# Altium PCB debugger.PcbDoc (part 1 of 2)
Units mm, origin at the board's own origin, x right, y up, seen from the top; angles counter-clockwise.
Board outline 42.72 x 30.76 mm, 2 copper layers (Top Layer, Bottom Layer); 55 components, 51 nets, 242 pads, 80 vias.
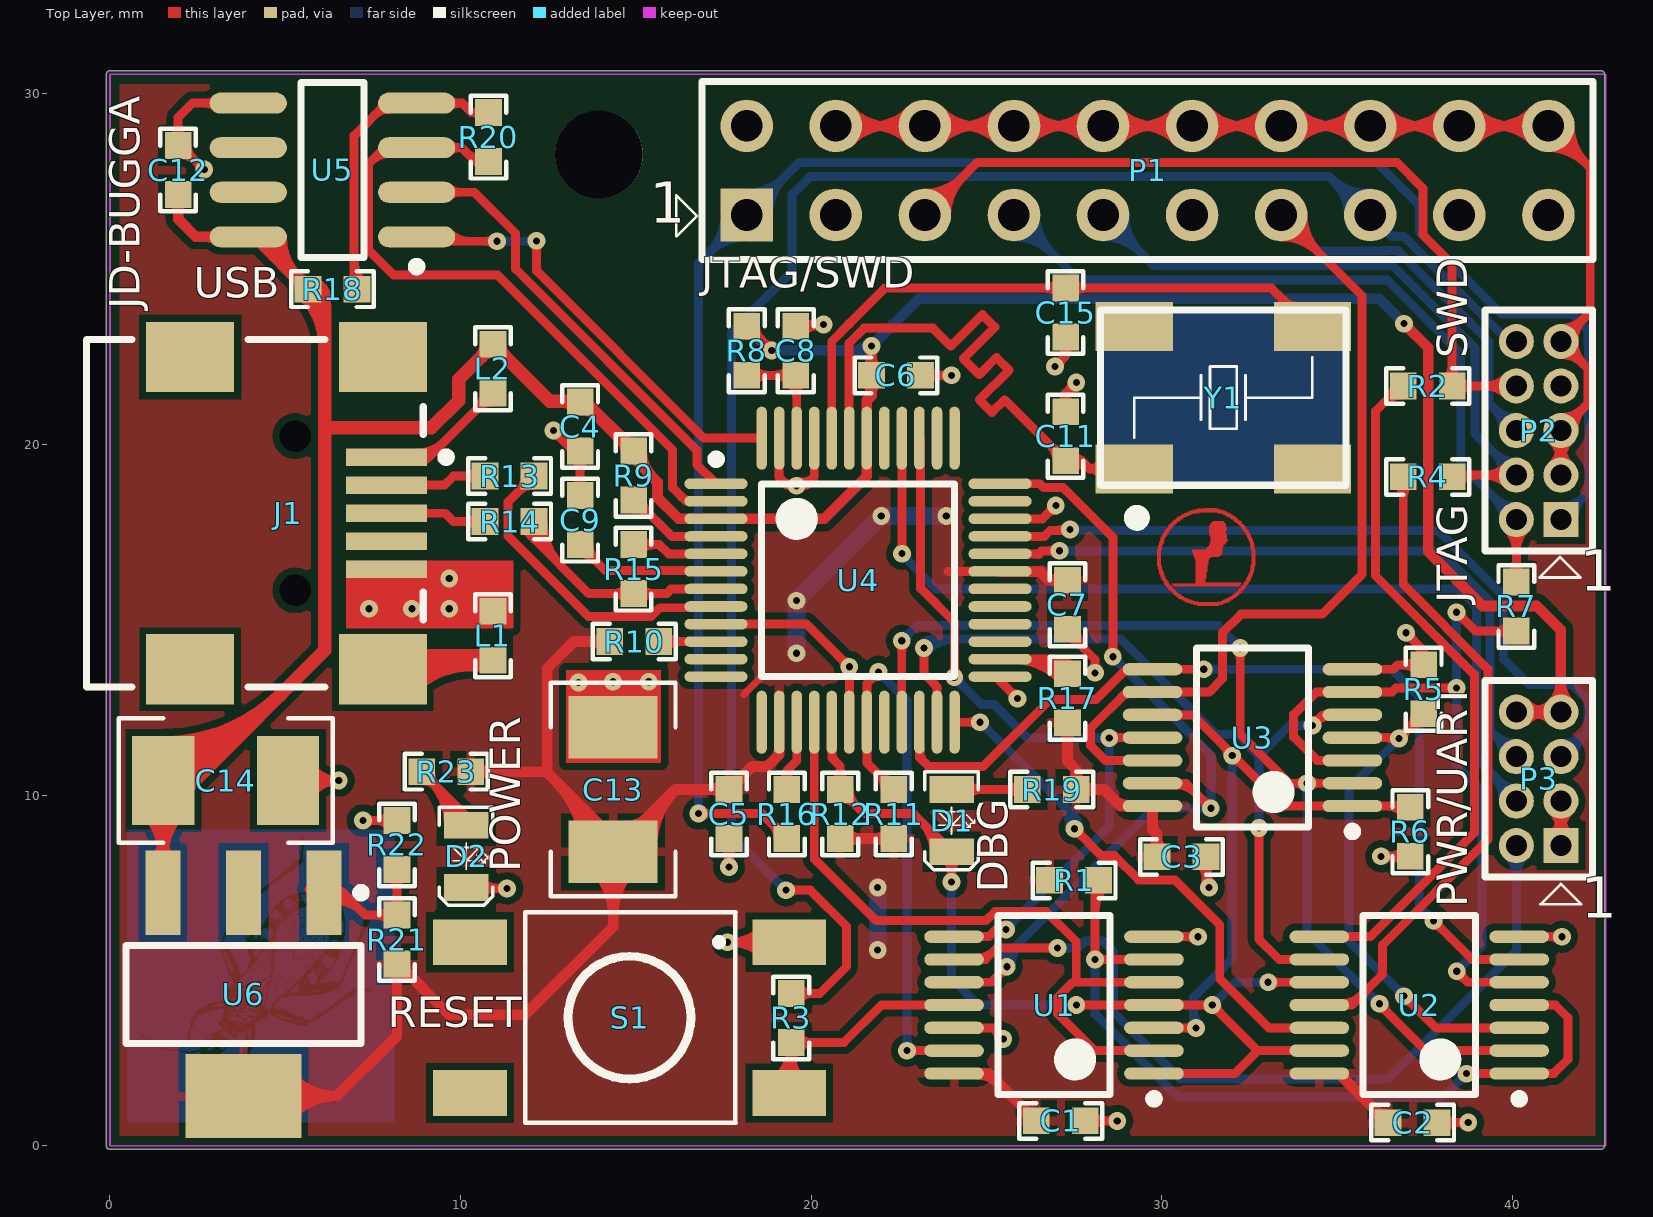
[diagram p0: Top Layer view]
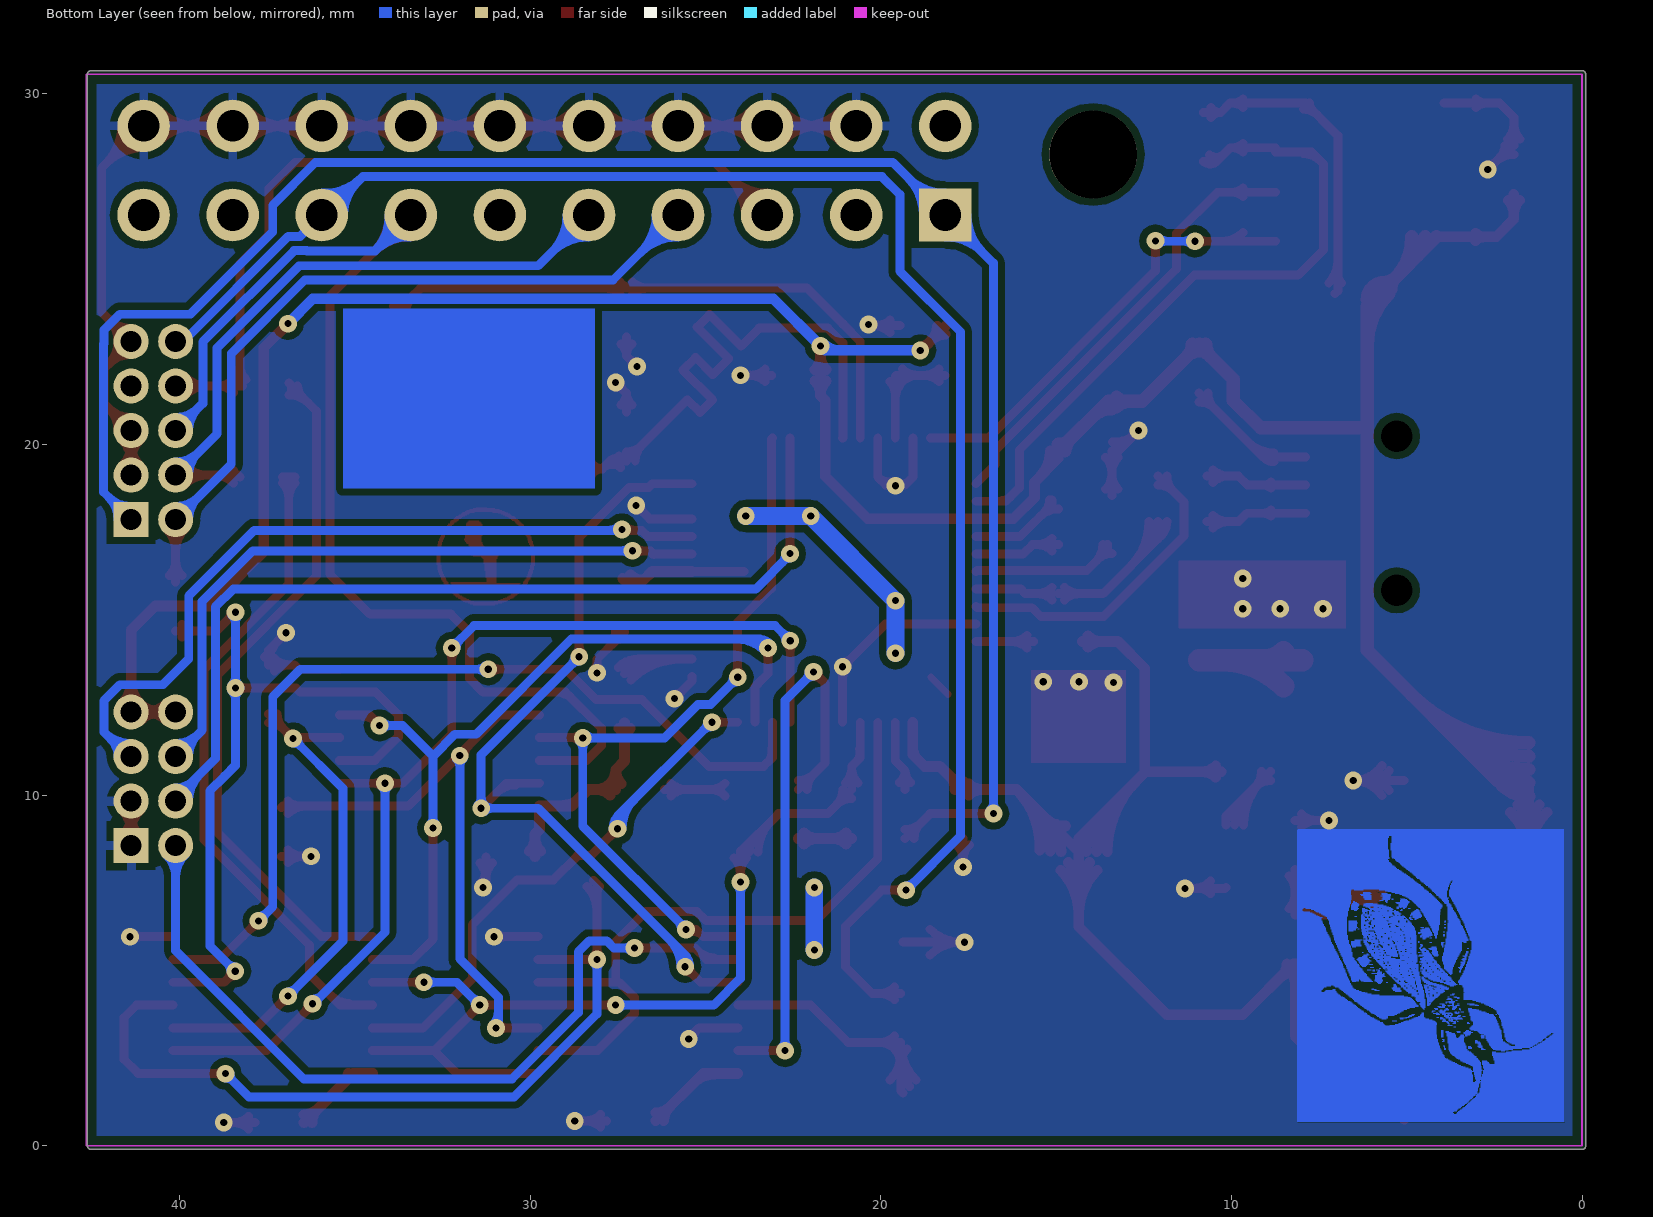
[diagram p1: Bottom Layer view, seen from below]

## Layer stack, top to bottom
Top Layer: signal copper 0.0356
Dielectric: dielectric 0.32, FR-4, Dk 4.8
Bottom Layer: signal copper 0.0356

## Board outline
0,-0.102 cw(c0,0) -0.102,0 -0.102,30.556 cw(c0,30.556) 0,30.658 42.52,30.658 cw(c42.52,30.556) 42.622,30.556 42.622,0 cw(c42.52,0) 42.52,-0.102

## Design rules (kind name [scope] priority, off if disabled: settings)
Clearance Clearance_GraphicalComponent [hasFootprint('BUG_INV')] p1: gap=0.001
Clearance Clearance_Keepout [Layer = ('KeepOutLayer') vs inPolygon] p2: gap=0.254
Clearance Clearance_Poly [inPoly] p3: gap=0.203
Clearance [All] p4: gap=0.127
ComponentClearance [All] p1: gap=0.152 collisioncheckmode=3 verticalgap=0.254 showdistances=FALSE
HoleSize [All] p1: absolutevalues=TRUE maxlimit=12.7 minlimit=0.203 maxpercent=80.000 minpercent=20.000
HoleToHoleClearance [All] p1: gap=0.3 allowstackedmicrovias=TRUE
MinimumSolderMaskSliver [All] p1: minsoldermaskwidth=0.05
PolygonConnect PolygonConnect_Via [IsVia] p1: connectstyle=Direct reliefconductorwidth=0.254 reliefentries=4 polygonreliefangle="90 Angle"
PolygonConnect [All] p2: connectstyle=Relief reliefconductorwidth=0.254 reliefentries=4 polygonreliefangle="90 Angle"
RoutingVias [All] p1: holewidth=0.203 width=0.508 viastyle="Through Hole" minholewidth=0.152 minwidth=0.457 maxholewidth=0.406 maxwidth=1.27
ShortCircuit ShortCircuit_GraphicalComponent [hasFootprint('BUG_INV')] p1: allowed=TRUE
ShortCircuit [All] p2: allowed=FALSE
SilkToSilkClearance [All] p1 off: silktosilkclearance=0.254
SilkscreenOverComponentPads [All] p1 off: minsilkscreentomaskgap=0.254
SolderMaskExpansion [All] p1: expansion=0.102
Width [All] p1: maxlimit=0.635 minlimit=0.025 preferedwidth=0.254
21 further rules are at their usual default settings.

## Components (designator, comment, footprint, x,y, rotation, side; value= is the part's Value field where it differs from the comment)
C1 "100nF" 0603 26.416,0.711 r0 top
C2 "100nF" 0603 36.449,0.66 r0 top
C3 "100nF" 0603 29.86,8.24 r0 top
C4 "100nF" 0603 13.411,21.209 r270 top
C5 "100nF" 0603 17.653,10.16 r270 top
C6 "100nF" 0603 23.114,21.971 r180 top
C7 "100nF" 0603 27.305,16.129 r270 top
C8 "100nF" 0603 19.558,23.368 r270 top
C9 "100nF" 0603 13.411,18.542 r270 top
C11 "20pF" 0603 27.254,19.533 r90 top
C12 "100nF" 0603 1.946,27.127 r90 top
C13 "22uF" 1210 14.351,11.938 r270 top
C14 "10uF" 1210 5.08,10.414 r180 top
C15 "20pF" 0603 27.254,24.46 r270 top
D1 "LED3" 0805_L 24.003,10.16 r270 top
D2 "LED3" 0805_L 10.16,9.144 r270 top
J1 "0481900001" 440247 0.036,18.039 r180 top
L1 "120ohm @ 100MHz" 0603 10.922,15.24 r270 top
L2 "120ohm @ 100MHz" 0603 10.922,21.463 r90 top
P1 "Header 10X2" HDR2X10 18.161,26.543 r0 top
P2 "MHDR2X5" MHDR2X5 41.377,17.856 r90 top
P3 "MHDR2X4" MHDR2X4 41.377,8.56 r90 top
R1 "10k" 0603 28.194,7.569 r180 top
R2 "27" 0603 36.881,21.666 r0 top
R3 "10" 0603 19.431,2.946 r90 top
R4 "27" 0603 36.881,19.075 r0 top
R5 "10k" 0603 37.465,13.716 r270 top
R6 "10k" 0603 37.084,8.255 r90 top
R7 "27" 0603 40.107,14.681 r90 top
R8 "475" 0603 18.161,23.368 r270 top
R9 "10k" 0603 14.935,18.415 r90 top
R10 "10k" 0603 15.649,14.379 r180 top
R11 "10k" 0603 22.352,10.16 r270 top
R12 "10k" 0603 20.828,10.16 r270 top
R13 "27E" 0603 10.7,19.1 r0 top
R14 "27E" 0603 10.7,17.8 r0 top
R15 "1k5" 0603 14.935,15.748 r90 top
R16 "10k" 0603 19.304,10.16 r270 top
R17 "10k" 0603 27.305,13.462 r270 top
R18 "10k" 0603 7.046,24.427 r180 top
R19 "330" 0603 27.559,10.16 r180 top
R20 "2k21" 0603 10.795,29.464 r270 top
R21 "2k7" 0603 8.185,6.581 r270 top
R22 "3k9" 0603 8.185,9.278 r270 top
R23 "330" 0603 10.287,10.668 r180 top
S1 "SW-PB" PUSHBTN 19.357,5.806 r270 top
U1 "SN74LVC125PWLE" PW014_N 26.924,4.013 r180 top
U2 "SN74LVC125PWLE" PW014_N 37.338,4.013 r180 top
U3 "SN74LS126AN" PW014_N 32.583,11.639 r180 top
U4 "FT2232D" LQFP-48_N 21.336,16.129 r0 top
U5 "93C46B-I/SN" SOIC-SN8_N 6.346,27.827 r180 top
U6 "LM1117IMP-ADJ" MP04A_N 3.81,4.318 r270 top
Y1 "XTAL" XTAL 31.75,21.336 r0 top
? "" GROUPTHERAPY 30.48,15.621 r0 top
? "" BUG_INV 0.508,9.017 r0 bottom

## Footprints (in the part's own frame and the unit in brackets; to place one, negate y for a bottom-side part, rotate by r counter-clockwise, add the part's x,y. Pads: shape width x height; smd on the part's side, far side on the other; paste and mask are expansions set on the pad)
0603 [mil]
  rect 30x30 smd: 1(0,0) 2(55,0)
  silkscreen extent -19,-20 74,20
0805_L [mil]
  rect 30x50 smd: 1(0,0) 2(70,0)
  silkscreen extent -20,-30 90,30
1210 [mil]
  rect 70x100 smd: 1(0,0) 2(140,0)
  silkscreen extent -50,-70 190,70
440247 [mm] "Connector; USB2.0, Type B, SM; 5 Position; Right Angle"
  rect 2.3x0.5 smd: 1(-7.85,-1.6) 2(-7.85,-0.8) 3(-7.85,0) 4(-7.85,0.8) 5(-7.85,1.6)
  rect 2.5x2 smd: 6(-7.75,4.45) 7(-2.25,4.45) 8(-7.75,-4.45) 9(-2.25,-4.45)
  round 0.6 hole 0.9 unplated: MH1(-5.25,2.2) MH2(-5.25,-2.2)
  silkscreen extent -9.68,-4.95 0.7,4.95
BUG_INV [mm]
  Top Layer drawing of 1912 lines, arcs and shapes, not listed
GROUPTHERAPY [mm]
  Top Layer lines w0.025: -0.61,0.914 -0.483,0.914 ; -0.61,0.94 -0.508,0.94 ; -0.61,0.965 -0.508,0.965 ; -0.61,0.991 -0.508,0.991 ; -0.61,1.016 -0.508,1.016 ; -0.61,1.041 -0.508,1.041 ; -0.61,1.067 -0.508,1.067 ; -0.61,1.092 -0.508,1.092 ; -0.61,1.118 -0.508,1.118 ; -0.61,1.143 -0.508,1.143 ; -0.61,1.168 -0.508,1.168 ; -0.61,1.194 -0.508,1.194 ; -0.61,1.219 -0.508,1.219 ; -0.61,1.245 -0.508,1.245 ; -0.61,1.27 -0.508,1.27 ; -0.61,1.295 -0.508,1.295 ; -0.61,1.321 -0.508,1.321 ; -0.61,1.346 -0.508,1.346 ; -0.61,1.372 -0.508,1.372 ; -0.61,1.397 -0.483,1.397 ; -0.584,0.813 -0.457,0.813 ; -0.584,0.838 -0.483,0.838 ; -0.584,0.864 -0.483,0.864 ; -0.584,0.889 -0.483,0.889 ; -0.584,1.422 -0.483,1.422 ; -0.584,1.448 -0.483,1.448 ; -0.584,1.473 -0.483,1.473 ; -0.584,1.499 -0.483,1.499 ; -0.559,0.711 -0.432,0.711 ; -0.559,0.737 -0.432,0.737 ; -0.559,0.762 -0.457,0.762 ; -0.559,0.787 -0.457,0.787 ; -0.559,1.524 -0.457,1.524 ; -0.559,1.549 -0.457,1.549 ; -0.559,1.575 -0.432,1.575 ; -0.559,1.6 -0.432,1.6 ; -0.533,0.66 -0.406,0.66 ; -0.533,0.686 -0.432,0.686 ; -0.533,1.626 -0.432,1.626 ; -0.533,1.651 -0.406,1.651 ; -0.508,0.61 -0.381,0.61 ; -0.508,0.635 -0.406,0.635 ; -0.508,1.676 -0.406,1.676 ; -0.508,1.702 -0.406,1.702 ; -0.508,1.727 -0.381,1.727 ; -0.483,0.533 -0.356,0.533 ; -0.483,0.559 -0.381,0.559 ; -0.483,0.584 -0.381,0.584 ; -0.483,1.753 -0.381,1.753 ; -0.483,1.778 -0.356,1.778 ; -0.457,0.508 -0.33,0.508 ; -0.457,1.803 -0.33,1.803 ; -0.457,1.829 -0.33,1.829 ; -0.432,0.457 -0.305,0.457 ; -0.432,0.483 -0.33,0.483 ; -0.432,1.854 -0.305,1.854 ; -0.406,0.406 -0.279,0.406 ; -0.406,0.432 -0.279,0.432 ; -0.406,1.88 -0.305,1.88 ; -0.406,1.905 -0.279,1.905 ; -0.381,0.381 -0.254,0.381 ; -0.381,1.93 -0.254,1.93 ; -0.381,1.956 -0.254,1.956 ; -0.356,0.356 -0.229,0.356 ; -0.356,1.981 -0.229,1.981 ; -0.33,0.305 -0.178,0.305 ; -0.33,0.33 -0.203,0.33 ; -0.33,2.007 -0.203,2.007 ; -0.305,0.279 -0.178,0.279 ; -0.305,2.032 -0.178,2.032 ; -0.305,2.057 -0.152,2.057 ; -0.279,0.254 -0.127,0.254 ; -0.279,2.083 -0.127,2.083 ; -0.254,0.229 -0.102,0.229 ; -0.254,2.108 -0.102,2.108 ; -0.229,0.203 -0.076,0.203 ; -0.229,2.134 -0.076,2.134 ; -0.203,0.178 -0.051,0.178 ; -0.203,0.406 1.778,0.406 ; -0.203,2.159 -0.051,2.159 ; -0.178,0.152 -0.025,0.152 ; -0.178,0.381 1.753,0.381 ; -0.178,2.184 -0.025,2.184 ; -0.152,0.127 0,0.127 ; -0.152,2.21 0.025,2.21 ; -0.127,0.102 0.051,0.102 ; -0.127,0.356 1.727,0.356 ; -0.127,2.235 0.051,2.235 ; -0.102,0.076 0.076,0.076 ; -0.076,2.261 0.102,2.261 ; -0.051,0.051 0.127,0.051 ; -0.051,2.286 0.127,2.286 ; -0.025,0.025 0.178,0.025 ; -0.025,2.311 0.178,2.311 ; 0,0 0.229,0 ; 0.025,2.337 0.229,2.337 ; 0.051,-0.025 0.279,-0.025 ; 0.051,2.362 0.305,2.362 ; 0.102,-0.051 0.356,-0.051 ; 0.102,2.388 0.356,2.388 ; 0.152,-0.076 0.432,-0.076 ; 0.152,2.413 0.432,2.413 ; 0.203,-0.102 0.559,-0.102 ; 0.203,2.438 0.584,2.438 ; 0.254,-0.127 1.372,-0.127 ; 0.254,2.464 1.372,2.464 ; 0.33,-0.152 1.295,-0.152 ; 0.33,2.489 1.321,2.489 ; 0.381,1.346 1.245,1.346 ; 0.381,1.372 1.245,1.372 ; 0.406,1.27 1.219,1.27 ; 0.406,1.295 1.245,1.295 ; 0.406,1.321 1.245,1.321 ; 0.406,2.515 1.245,2.515 ; 0.432,-0.178 1.245,-0.178 ; 0.432,1.194 1.143,1.194 ; 0.432,1.219 1.194,1.219 ; 0.432,1.245 1.219,1.245 ; 0.457,1.118 0.864,1.118 ; 0.457,1.143 0.889,1.143 ; 0.457,1.168 0.914,1.168 ; 0.483,0.432 1.778,0.432 ; 0.483,0.457 0.762,0.457 ; 0.483,0.483 0.762,0.483 ; 0.483,0.508 0.762,0.508 ; 0.483,0.533 0.762,0.533 ; 0.483,0.559 0.762,0.559 ; 0.483,0.584 0.787,0.584 ; 0.483,0.61 0.787,0.61 ; 0.483,0.635 0.787,0.635 ; 0.483,0.66 0.787,0.66 ; 0.483,0.686 0.787,0.686 ; 0.483,0.711 0.787,0.711 ; 0.483,0.737 0.787,0.737 ; 0.483,0.762 0.813,0.762 ; 0.483,0.787 0.813,0.787 ; 0.483,0.813 0.813,0.813 ; 0.483,0.838 0.813,0.838 ; 0.483,0.864 0.813,0.864 ; 0.483,0.889 0.813,0.889 ; 0.483,0.914 0.813,0.914 ; 0.483,0.94 0.813,0.94 ; 0.483,0.965 0.838,0.965 ; 0.483,0.991 0.838,0.991 ; 0.483,1.016 0.838,1.016 ; 0.483,1.041 0.838,1.041 ; 0.483,1.067 0.838,1.067 ; 0.483,1.092 0.838,1.092 ; 0.533,-0.203 1.143,-0.203 ; 0.533,2.54 1.143,2.54 ; 0.737,2.565 1.067,2.565 ; 0.787,1.397 1.245,1.397 ; 0.787,1.422 1.245,1.422 ; 0.813,1.448 1.245,1.448 ; 0.838,1.473 1.27,1.473 ; 0.864,1.499 1.27,1.499 ; 0.864,1.524 1.27,1.524 ; 0.864,1.854 1.346,1.854 ; 0.864,1.88 1.346,1.88 ; 0.864,1.905 1.346,1.905 ; 0.864,1.93 1.346,1.93 ; 0.864,1.956 1.372,1.956 ; 0.864,1.981 1.372,1.981 ; 0.864,2.007 1.372,2.007 ; 0.864,2.032 1.346,2.032 ; 0.889,1.549 1.321,1.549 ; 0.889,1.575 1.346,1.575 ; 0.889,1.778 1.372,1.778 ; 0.889,1.803 1.372,1.803 ; 0.889,1.829 1.346,1.829 ; 0.889,2.057 1.346,2.057 ; 0.889,2.083 1.346,2.083 ; 0.914,1.6 1.372,1.6 ; 0.914,1.626 1.372,1.626 ; 0.914,1.651 1.397,1.651 ; 0.914,1.676 1.397,1.676 ; 0.914,1.702 1.372,1.702 ; 0.914,1.727 1.372,1.727 ; 0.914,1.753 1.372,1.753 ; 0.914,2.108 1.346,2.108 ; 0.914,2.134 1.321,2.134 ; 0.94,2.159 1.295,2.159 ; 0.991,2.184 1.27,2.184 ; 1.118,-0.102 1.422,-0.102 ; 1.118,2.438 1.422,2.438 ; 1.219,-0.076 1.473,-0.076 ; 1.219,2.413 1.473,2.413 ; 1.27,-0.051 1.499,-0.051 ; 1.27,2.388 1.499,2.388 ; 1.321,2.362 1.549,2.362 ; 1.346,-0.025 1.549,-0.025 ; 1.372,0 1.575,0 ; 1.372,2.337 1.575,2.337 ; 1.422,0.025 1.626,0.025 ; 1.422,2.311 1.626,2.311 ; 1.473,0.051 1.651,0.051 ; 1.473,2.286 1.651,2.286 ; 1.499,2.261 1.676,2.261 ; 1.524,0.076 1.702,0.076 ; 1.549,0.102 1.702,0.102 ; 1.549,2.235 1.702,2.235 ; 1.575,0.127 1.727,0.127 ; 1.575,2.21 1.753,2.21 ; 1.6,2.184 1.778,2.184 ; 1.626,0.152 1.778,0.152 ; 1.626,0.178 1.778,0.178 ; 1.626,2.159 1.803,2.159 ; 1.676,0.203 1.803,0.203 ; 1.676,2.134 1.803,2.134 ; 1.702,0.229 1.854,0.229 ; 1.702,2.108 1.854,2.108 ; 1.727,0.254 1.854,0.254 ; 1.727,0.279 1.88,0.279 ; 1.727,2.083 1.854,2.083 ; 1.753,2.057 1.88,2.057 ; 1.778,0.305 1.905,0.305 ; 1.778,0.33 1.905,0.33 ; 1.778,2.007 1.905,2.007 ; 1.778,2.032 1.905,2.032 ; 1.803,0.356 1.93,0.356 ; 1.803,1.981 1.93,1.981 ; 1.829,0.381 1.956,0.381 ; 1.829,1.956 1.956,1.956 ; 1.854,0.406 1.981,0.406 ; 1.854,0.432 1.981,0.432 ; 1.854,1.905 1.981,1.905 ; 1.854,1.93 1.981,1.93 ; 1.88,0.457 2.007,0.457 ; 1.88,1.88 2.007,1.88 ; 1.905,0.483 2.007,0.483 ; 1.905,0.508 2.032,0.508 ; 1.905,1.829 2.032,1.829 ; 1.905,1.854 2.007,1.854 ; 1.93,0.533 2.057,0.533 ; 1.93,0.559 2.057,0.559 ; 1.93,1.803 2.057,1.803 ; 1.956,0.584 2.057,0.584 ; 1.956,0.61 2.083,0.61 ; 1.956,1.727 2.083,1.727 ; 1.956,1.753 2.057,1.753 ; 1.956,1.778 2.057,1.778 ; 1.981,0.635 2.083,0.635 ; 1.981,0.66 2.108,0.66 ; 1.981,1.676 2.108,1.676 ; 1.981,1.702 2.083,1.702 ; 2.007,0.686 2.108,0.686 ; 2.007,0.711 2.108,0.711 ; 2.007,0.737 2.134,0.737 ; 2.007,1.6 2.134,1.6 ; 2.007,1.626 2.108,1.626 ; 2.007,1.651 2.108,1.651 ; 2.032,0.762 2.134,0.762 ; 2.032,0.787 2.134,0.787 ; 2.032,0.813 2.159,0.813 ; 2.032,1.524 2.159,1.524 ; 2.032,1.549 2.134,1.549 ; 2.032,1.575 2.134,1.575 ; 2.057,0.838 2.159,0.838 ; 2.057,0.864 2.159,0.864 ; 2.057,0.889 2.159,0.889 ; 2.057,0.914 2.159,0.914 ; 2.057,0.94 2.184,0.94 ; 2.057,1.397 2.184,1.397 ; 2.057,1.422 2.159,1.422 ; 2.057,1.448 2.159,1.448 ; 2.057,1.473 2.159,1.473 ; 2.057,1.499 2.159,1.499 ; 2.083,0.965 2.184,0.965 ; 2.083,0.991 2.184,0.991 ; 2.083,1.016 2.184,1.016 ; 2.083,1.041 2.184,1.041 ; 2.083,1.067 2.184,1.067 ; 2.083,1.092 2.184,1.092 ; 2.083,1.118 2.184,1.118 ; 2.083,1.143 2.184,1.143 ; 2.083,1.168 2.184,1.168 ; 2.083,1.194 2.184,1.194 ; 2.083,1.219 2.184,1.219 ; 2.083,1.245 2.184,1.245 ; 2.083,1.27 2.184,1.27 ; 2.083,1.295 2.184,1.295 ; 2.083,1.321 2.184,1.321 ; 2.083,1.346 2.184,1.346 ; 2.083,1.372 2.184,1.372
HDR2X10 [mm] "Connector; Header; 10x2 Position"
  rect 1.5x1.5 hole 0.9: 1(0,0)
  round 1.5 hole 0.9: 2(0,2.54) 3(2.54,0) 4(2.54,2.54) 5(5.08,0) 6(5.08,2.54) 7(7.62,0) 8(7.62,2.54) 9(10.16,0) 10(10.16,2.54) 11(12.7,0) 12(12.7,2.54) 13(15.24,0) 14(15.24,2.54) 15(17.78,0) 16(17.78,2.54) 17(20.32,0) 18(20.32,2.54) 19(22.86,0) 20(22.86,2.54)
  silkscreen extent -1.27,-1.27 24.13,3.81
LQFP-48_N [mm] "Thin QFP, 48-Leads, Body 7x7mm, Pitch 0.5mm, IPC Medium Density"
  oval 1.8x0.3 smd: 1(-4.05,2.75) 2(-4.05,2.25) 3(-4.05,1.75) 4(-4.05,1.25) 5(-4.05,0.75) 6(-4.05,0.25) 7(-4.05,-0.25) 8(-4.05,-0.75) 9(-4.05,-1.25) 10(-4.05,-1.75) 11(-4.05,-2.25) 12(-4.05,-2.75) 25(4.05,-2.75) 26(4.05,-2.25) 27(4.05,-1.75) 28(4.05,-1.25) 29(4.05,-0.75) 30(4.05,-0.25) 31(4.05,0.25) 32(4.05,0.75) 33(4.05,1.25) 34(4.05,1.75) 35(4.05,2.25) 36(4.05,2.75)
  oval 0.3x1.8 smd: 13(-2.75,-4.05) 14(-2.25,-4.05) 15(-1.75,-4.05) 16(-1.25,-4.05) 17(-0.75,-4.05) 18(-0.25,-4.05) 19(0.25,-4.05) 20(0.75,-4.05) 21(1.25,-4.05) 22(1.75,-4.05) 23(2.25,-4.05) 24(2.75,-4.05) 37(2.75,4.05) 38(2.25,4.05) 39(1.75,4.05) 40(1.25,4.05) 41(0.75,4.05) 42(0.25,4.05) 43(-0.25,4.05) 44(-0.75,4.05) 45(-1.25,4.05) 46(-1.75,4.05) 47(-2.25,4.05) 48(-2.75,4.05)
  silkscreen extent -4.17,-2.75 2.75,3.57, body extent -3.5,-3.5 3.5,3.5, height 1.6
MHDR2X4 [mm] "Connector; Header; 4x2 Position"
  rect 1x1 hole 0.6: 1(0,0)
  round 1 hole 0.6: 2(0,1.27) 3(1.27,0) 4(1.27,1.27) 5(2.54,0) 6(2.54,1.27) 7(3.81,0) 8(3.81,1.27)
  silkscreen extent -0.9,-0.9 4.71,2.17, body extent -1,-1 4.81,2.27, height 3.4
MHDR2X5 [mm] "Connector; Header; 5x2 Position"
  rect 1x1 hole 0.6: 1(0,0)
  round 1 hole 0.6: 2(0,1.27) 3(1.27,0) 4(1.27,1.27) 5(2.54,0) 6(2.54,1.27) 7(3.81,0) 8(3.81,1.27) 9(5.08,0) 10(5.08,1.27)
  silkscreen extent -0.9,-0.9 5.98,2.17, body extent -1,-1 6.08,2.27, height 3.4
MP04A_N [mm] "SOT223, 4-Leads, Body 6.5x3.5mm, Pitch 2.3mm, Lead Span 7mm, IPC Medium Density"
  rect 2.4x1 smd: 1(-2.9,2.3) 2(-2.9,0) 3(-2.9,-2.3)
  rect 2.4x3.3 smd: 4(2.9,0)
  silkscreen extent -3.02,-3.35 1.4,3.48, body extent -1.85,-3.35 1.85,3.35, height 1.8
PUSHBTN [mm]
  rect 1.3x2.1 smd: 1(-0.001,0.011) 2(4.299,0.011) 3(-0.001,-9.089) 4(4.299,-9.089)
  silkscreen extent -0.85,-7.51 5.15,-1.51, body extent -0.85,-7.51 5.15,-1.52, height 4.3
PW014_N [mm] "TSOP, 14-Leads, Body 5x4.4mm, Pitch 0.65mm, IPC Medium Density"
  oval 1.7x0.35 smd: 1(-2.85,1.95) 2(-2.85,1.3) 3(-2.85,0.65) 4(-2.85,0) 5(-2.85,-0.65) 6(-2.85,-1.3) 7(-2.85,-1.95) 8(2.85,-1.95) 9(2.85,-1.3) 10(2.85,-0.65) 11(2.85,0) 12(2.85,0.65) 13(2.85,1.3) 14(2.85,1.95)
  silkscreen extent -2.98,-2.55 1.6,2.8, body extent -2.25,-2.55 2.25,2.55, height 1.2
SOIC-SN8_N [mm] "SOIC, 8-Leads, Body 4.9x3.8mm, Pitch 1.27mm, IPC Medium Density"
  oval 2.2x0.6 smd: 1(-2.4,1.905) 2(-2.4,0.635) 3(-2.4,-0.635) 4(-2.4,-1.905) 5(2.4,-1.905) 6(2.4,-0.635) 7(2.4,0.635) 8(2.4,1.905)
  silkscreen extent -2.53,-2.5 0.9,2.88, body extent -2,-2.5 2,2.5, height 1.75
XTAL [mm]
  rect 2.2x1.4 smd: 1(-2.54,-2.032) 2(2.54,-2.032) 3(2.54,2.032) 4(-2.54,2.032)
  silkscreen extent -3.5,-3.61 3.5,2.5, body extent -3.5,-2.5 3.5,2.5, height 1.5

## Part data
C1 C2 C3 C4 C5 C6 C7 C8 C9 C11 C12 C13 C14 C15: library part Cap, "Capacitor"
D1 D2: "Typical BLUE SiC LED"
J1: "USB On-The-Go (OTG) Mini-B Receptacle, Right Angle, SMT, 0.80mm (.031\") Pitch, Solder Tabs with Back Cover, Recessed Type"
L1 L2: library part Inductor, "Inductor"
P1: "Header, 10-Pin, Dual row"
P2: "Header, 5-Pin, Dual row"
P3: "Header, 4-Pin, Dual row"
R1 R2 R3 R4 R5 R6 R7 R8 R9 R10 R11 R12 R13 R14 R15 R16 R17 R18 R19 R20 R21 R22 R23: library part Res2, "Resistor"
S1: "Switch"
U1 U2: "Quadruple Bus Buffer Gate with 3-State Outputs"
U3: "Quadruple Bus Buffer with 3-State Outputs"
U4: library part FT2232C, "Dual USB UART/FIFO Chip, LQFP-48"
U5: "1K, 64x16-bit, 5.0V Microwire Serial EEPROM, 8-Pin SOIC 150mil, Industrial Temperature"
U6: "800mA Low-Dropout Linear Regulator"
Y1: "Crystal Oscillator"

## Free pads (board coordinates)
  round 2.5 hole 2.5 unplated: ""(13.945,28.27)

## Via types
v1: diameter 0.508, hole 0.203, Top Layer to Bottom Layer, tented both sides, 80 vias

## Nets (pads, with @x,y where several pads share a name; then routed paths per layer and width w, separated by ;. In a path a pad name is that pad's centre, name@x,y a point inside that pad or via, vN(x,y) a via of type N, cw(c..) or ccw(c..) an arc to the next point about the centre after c; other vN are vias at no path point)
0V: C1.2 C2.2 C3.2 C4.2 C5.2 C6.1 C7.2 C8.1 C9.1 C11.2 C12.2 C13.1 C14.1 C15.2 D2.2 J1.5 L1.1 P1.4 P1.6 P1.8 P1.10 P1.12 P1.14 P1.16 P1.18 P1.20 P2.3 P2.5 P2.9 P3.1 P3.3 R5.1 R6.1 R22.1 S1.1 U1.7 U1.12 U2.7 U3.7 U4.9 U4.18 U4.25 U4.34 U4.45 U4.47 U5.5 | length 191.5
  Top Layer w0.254: C12.2@1.767,28.704 ccw(c1.333,29.137) 1.946,29.137 ccw(c2.559,29.137) C12.2@2.126,28.704 ; C12.2@1.946,28.27 cw(c1.946,27.51) 2.483,28.048 ; C12.2@2.2,28.524 ccw(c2.667,28.524) 2.337,28.194 ; v1@2.565,27.838 ccw(c2.259,27.838) 2.476,28.055 ccw(c2.692,28.272) v1@2.692,27.965 ; v1(2.692,27.838) 2.007,28.524 C12.2@1.946,28.524 1.946,29.327 2.351,29.732 U5.5@3.946,29.732 ; U5.5@3.024,29.61 ccw(c2.729,29.314) 2.729,29.732 ccw(c2.729,30.15) U5.5@3.024,29.854 ; C14.1@5.08,10.414 v1(6.528,10.414) ; C14.1@5.499,10.126 cw(c6.045,9.751) 6.045,10.414 cw(c6.045,11.077) C14.1@5.499,10.702 ; C14.1@5.708,9.983 cw(c6.528,9.42) v1(6.528,10.414) ; C14.1@5.708,10.845 ccw(c6.528,11.408) v1(6.528,10.414) ; v1@6.438,10.324 ccw(c6.221,10.107) 6.221,10.414 ccw(c6.221,10.721) v1@6.438,10.504 ; v1@6.579,10.414 v1(6.528,10.414) ; v1(7.22,9.278) R22.1@8.185,9.278 ; v1@7.31,9.188 cw(c7.527,8.971) 7.527,9.278 cw(c7.527,9.584) v1@7.31,9.367 ; J1.5@8,16.4 9.677,16.4 10.143,16.4 ; R22.1@8.005,9.098 ccw(c7.572,8.664) 7.572,9.278 ccw(c7.572,9.891) R22.1@8.005,9.457 ; J1.5@8.839,16.4 cw(c8.839,15.342) v1@9.588,16.09 ; J1.5@8.873,16.526 ccw(c9.177,16.83) 9.177,16.4 ; 9.453,16.4 cw(c9.453,15.955) v1@9.767,16.27 ; v1@9.799,16.144 cw(c10.143,16.041) 10.143,16.4 ; D2.2@10.16,7.366 10.185,7.341 v1(11.328,7.341) ; 10.219,16.324 cw(c9.135,15.24) L1.1@10.668,15.24 ; D2.2@10.594,7.186 cw(c10.966,6.814) 10.966,7.341 ; D2.2@10.594,7.546 ccw(c11.089,8.041) v1@11.089,7.341 ; 10.653,15.89 cw(c10.002,15.24) L1.1@10.922,15.24 ; L1.1@11.176,15.367 11.112,15.43 10.143,16.4 ; v1@11.239,7.251 ccw(c11.022,7.034) 11.022,7.341 ccw(c11.022,7.647) v1@11.239,7.43 ; v1@12.649,20.269 cw(c12.649,19.963) 12.866,20.179 cw(c13.083,20.396) v1@12.776,20.396 ; v1(12.649,20.396) 13.233,19.812 C4.2@13.411,19.812 C9.1@13.411,18.542 ; v1@12.738,20.307 ccw(c13.328,20.897) C4.2@13.392,20.065 ; C9.1@13.232,18.722 ccw(c12.798,19.155) 13.411,19.155 ccw(c14.024,19.155) C9.1@13.591,18.722 ; C4.2@13.232,19.632 cw(c12.798,19.199) 13.411,19.199 cw(c14.024,19.199) C4.2@13.591,19.632 ; U4.9@17.286,14.879 19.868,14.879 v1(21.086,13.661) U4.18@21.086,12.079 ; C5.2@17.473,8.583 cw(c17.04,8.15) 17.653,8.15 cw(c18.266,8.15) C5.2@17.833,8.583 ; v1@17.563,8.04 ccw(c17.346,8.257) 17.653,8.257 ccw(c17.96,8.257) v1@17.743,8.04 ; v1(17.612,5.806) S1.1@19.368,5.806 ; v1(17.653,7.95) C5.2@17.653,8.763 ; v1@17.702,5.717 cw(c17.919,5.5) 17.919,5.806 cw(c17.919,6.113) v1@17.702,5.896 ; S1.1@18.598,5.437 ccw(c17.705,4.544) 17.705,5.806 ccw(c17.705,7.069) S1.1@18.598,6.176 ; U4.47@19.086,20.179 19.086,19.065 19.304,18.847 ; 19.213,18.938 ccw(c19.368,19.093) v1@19.505,18.921 ; C8.1@19.456,23.393 19.558,23.393 20.345,23.393 20.371,23.393 v1(20.345,23.419) ; v1@19.477,18.753 ccw(c19.304,18.642) 19.304,18.847 ; v1@19.616,18.944 ccw(c19.742,19.414) 20.086,19.07 ; v1@19.69,18.753 cw(c19.863,18.642) 19.863,18.847 ; C8.1@19.738,23.188 cw(c20.233,22.693) v1@20.233,23.393 ; C8.1@19.738,23.548 ccw(c20.11,23.92) v1@20.11,23.393 ; 19.977,23.393 ccw(c19.977,23.787) v1@20.256,23.509 ; U4.45@20.086,20.179 20.086,19.07 ; P1.4@20.701,29.083 P1.6@23.241,29.083 P1.8@25.781,29.083 P1.10@28.321,29.083 P1.12@30.861,29.083 P1.14@33.401,29.083 P1.16@35.941,29.083 P1.18@38.481,29.083 P1.20@41.021,29.083 42.215,27.889 42.215,24.333 ; v1@20.959,13.661 ccw(c20.652,13.661) 20.869,13.878 ccw(c21.086,14.095) v1@21.086,13.788 ; P1.4@20.962,28.822 cw(c21.592,28.192) 21.592,29.083 cw(c21.592,29.974) P1.4@20.962,29.344 ; v1@20.996,13.571 cw(c20.779,13.355) 21.086,13.355 cw(c21.393,13.355) v1@21.176,13.571 ; P1.4@21.142,28.642 cw(c22.205,27.579) 22.205,29.083 cw(c22.205,30.587) P1.4@21.142,29.524 ; P1.6@22.8,28.642 ccw(c21.737,27.579) 21.737,29.083 ccw(c21.737,30.587) P1.6@22.8,29.524 ; P1.6@22.98,28.822 ccw(c22.35,28.192) 22.35,29.083 ccw(c22.35,29.974) P1.6@22.98,29.344 ; C6.1@23.114,21.971 v1(24.003,21.971) ; C6.1@23.294,21.791 cw(c23.727,21.358) 23.727,21.971 cw(c23.727,22.584) C6.1@23.294,22.151 ; P1.6@23.502,28.822 cw(c24.132,28.192) 24.132,29.083 cw(c24.132,29.974) P1.6@23.502,29.344 ; P1.6@23.682,28.642 cw(c24.745,27.579) 24.745,29.083 cw(c24.745,30.587) P1.6@23.682,29.524 ; v1@23.913,21.881 ccw(c23.696,21.664) 23.696,21.971 ccw(c23.696,22.278) v1@23.913,22.061 ; U1.12@24.074,3.363 25.186,3.363 v1@25.476,3.073 ; 25.241,3.308 cw(c24.981,3.048) v1@25.349,3.048 ; 25.303,3.247 ccw(c25.476,3.42) v1@25.476,3.175 ; P1.8@25.34,28.642 ccw(c24.277,27.579) 24.277,29.083 ccw(c24.277,30.587) P1.8@25.34,29.524 ; U4.25@25.386,13.379 25.386,13.247 v1(25.883,12.751) ; U4.34@25.386,17.879 26.591,17.879 v1(26.975,18.263) ; P1.8@25.52,28.822 ccw(c24.89,28.192) 24.89,29.083 ccw(c24.89,29.974) P1.8@25.52,29.344 ; v1@25.756,12.751 ccw(c25.449,12.751) 25.666,12.968 ccw(c25.883,13.184) v1@25.883,12.878 ; P1.8@26.042,28.822 cw(c26.672,28.192) 26.672,29.083 cw(c26.672,29.974) P1.8@26.042,29.344 ; P1.8@26.222,28.642 cw(c27.285,27.579) 27.285,29.083 cw(c27.285,30.587) P1.8@26.222,29.524 ; v1@26.848,18.263 cw(c26.541,18.263) 26.758,18.046 cw(c26.975,17.829) v1@26.975,18.136 ; v1(26.949,22.225) 27.254,22.53 ; v1@26.949,22.352 ccw(c26.949,22.659) 27.166,22.442 ccw(c27.383,22.225) v1@27.076,22.225 ; C11.2@27.094,21.127 ccw(c26.821,21.463) 27.254,21.463 ; C15.2@27.094,22.866 cw(c26.821,22.53) 27.254,22.53 ; C11.2@27.254,20.93 27.254,21.463 ; C15.2@27.254,23.063 27.254,22.53 ; C7.2@27.305,14.478 cw(c27.305,14.049) C7.2@27.609,14.352 ; C7.2@27.305,14.656 28.092,13.868 v1(28.092,13.487) ; C11.2@27.414,21.127 cw(c27.687,21.463) 27.254,21.463 ; C15.2@27.414,22.866 ccw(c27.687,22.53) 27.254,22.53 ; v1@27.432,21.768 cw(c27.125,21.768) 27.342,21.551 cw(c27.559,21.334) v1@27.559,21.641 ; C7.2@27.559,14.732 ccw(c28.356,14.732) 27.792,14.168 ; v1(27.559,21.768) 27.254,21.463 ; C1.2@27.813,0.711 v1(28.727,0.711) v1@28.753,0.711 ; P1.10@27.88,28.642 ccw(c26.817,27.579) 26.817,29.083 ccw(c26.817,30.587) P1.10@27.88,29.524 ; C1.2@27.993,0.532 cw(c28.426,0.098) 28.426,0.711 cw(c28.426,1.324) C1.2@27.993,0.891 ; v1@28.003,13.577 ccw(c27.786,13.794) 28.092,13.794 ccw(c28.399,13.794) v1@28.182,13.577 ; P1.10@28.06,28.822 ccw(c27.43,28.192) 27.43,29.083 ccw(c27.43,29.974) P1.10@28.06,29.344 ; P1.10@28.582,28.822 cw(c29.212,28.192) 29.212,29.083 cw(c29.212,29.974) P1.10@28.582,29.344 ; v1@28.638,0.621 ccw(c28.421,0.405) 28.421,0.711 ccw(c28.421,1.018) v1@28.638,0.801 ; P1.10@28.762,28.642 cw(c29.825,27.579) 29.825,29.083 cw(c29.825,30.587) P1.10@28.762,29.524 ; U1.7@29.774,5.963 v1(31.033,5.963) ; P1.12@30.42,28.642 ccw(c29.357,27.579) 29.357,29.083 ccw(c29.357,30.587) P1.12@30.42,29.524 ; P1.12@30.6,28.822 ccw(c29.97,28.192) 29.97,29.083 ccw(c29.97,29.974) P1.12@30.6,29.344 ; v1@30.943,5.873 ccw(c30.726,5.657) 30.726,5.963 ccw(c30.726,6.27) v1@30.943,6.053 ; C3.2@31.077,8.06 cw(c30.644,7.627) 31.257,7.627 cw(c31.87,7.627) C3.2@31.437,8.06 ; P1.12@31.122,28.822 cw(c31.752,28.192) 31.752,29.083 cw(c31.752,29.974) P1.12@31.122,29.344 ; C3.2@31.257,7.882 ccw(c31.859,7.882) v1@31.433,7.456 ; C3.2@31.257,8.24 31.257,7.453 v1(31.344,7.366) v1@31.445,7.366 ; P1.12@31.302,28.642 cw(c32.365,27.579) 32.365,29.083 cw(c32.365,30.587) P1.12@31.302,29.524 ; P1.14@32.96,28.642 ccw(c31.897,27.579) 31.897,29.083 ccw(c31.897,30.587) P1.14@32.96,29.524 ; P1.14@33.14,28.822 ccw(c32.51,28.192) 32.51,29.083 ccw(c32.51,29.974) P1.14@33.14,29.344 ; P1.14@33.662,28.822 cw(c34.292,28.192) 34.292,29.083 cw(c34.292,29.974) P1.14@33.662,29.344 ; P1.14@33.842,28.642 cw(c34.905,27.579) 34.905,29.083 cw(c34.905,30.587) P1.14@33.842,29.524 ; U3.7@35.433,13.589 36.601,13.589 36.728,13.716 R5.1@37.465,13.716 ; P1.16@35.5,28.642 ccw(c34.437,27.579) 34.437,29.083 ccw(c34.437,30.587) P1.16@35.5,29.524 ; P1.16@35.68,28.822 ccw(c35.05,28.192) 35.05,29.083 ccw(c35.05,29.974) P1.16@35.68,29.344 ; P1.16@36.202,28.822 cw(c36.832,28.192) 36.832,29.083 cw(c36.832,29.974) P1.16@36.202,29.344 ; v1(36.246,8.255) R6.1@37.084,8.255 ; v1@36.336,8.165 cw(c36.552,7.948) 36.552,8.255 cw(c36.552,8.562) v1@36.336,8.345 ; P1.16@36.382,28.642 cw(c37.445,27.579) 37.445,29.083 cw(c37.445,30.587) P1.16@36.382,29.524 ; R6.1@36.904,8.075 ccw(c36.471,7.642) 36.471,8.255 ccw(c36.471,8.868) R6.1@36.904,8.435 ; v1@36.957,14.503 cw(c36.957,14.197) 37.174,14.414 cw(c37.391,14.63) v1@37.084,14.63 ; v1(36.957,14.63) 37.465,14.122 ; 37.183,14.405 cw(c36.502,13.723) R5.1@37.465,13.716 ; R5.1@37.285,13.536 ccw(c36.852,13.103) 36.852,13.716 ccw(c36.852,14.329) R5.1@37.285,13.896 ; R5.1@37.354,13.944 ccw(c37.267,14.122) 37.465,14.122 ; R5.1@37.576,13.944 cw(c37.663,14.122) 37.465,14.122 ; C2.2@37.846,0.66 v1(38.735,0.66) v1@38.76,0.66 ; C2.2@38.026,0.481 cw(c38.459,0.047) 38.459,0.66 cw(c38.459,1.274) C2.2@38.026,0.84 ; P1.18@38.04,28.642 ccw(c36.977,27.579) 36.977,29.083 ccw(c36.977,30.587) P1.18@38.04,29.524 ; P1.18@38.22,28.822 ccw(c37.59,28.192) 37.59,29.083 ccw(c37.59,29.974) P1.18@38.22,29.344 ; v1@38.645,0.571 ccw(c38.428,0.354) 38.428,0.66 ccw(c38.428,0.967) v1@38.645,0.75 ; P1.18@38.742,28.822 cw(c39.372,28.192) 39.372,29.083 cw(c39.372,29.974) P1.18@38.742,29.344 ; P1.18@38.922,28.642 cw(c39.985,27.579) 39.985,29.083 cw(c39.985,30.587) P1.18@38.922,29.524 ; U2.7@40.188,5.963 v1(41.408,5.963) ; P1.20@40.58,28.642 ccw(c39.517,27.579) 39.517,29.083 ccw(c39.517,30.587) P1.20@40.58,29.524 ; P1.20@40.76,28.822 ccw(c40.13,28.192) 40.13,29.083 ccw(c40.13,29.974) P1.20@40.76,29.344 ; P1.20@41.021,28.46 cw(c41.021,26.956) 42.085,28.019 cw(c43.148,29.083) P1.20@41.644,29.083 ; P1.20@41.021,28.714 cw(c41.021,27.823) 41.651,28.453 cw(c42.281,29.083) P1.20@41.39,29.083 ; P3.1@41.113,8.824 ccw(c40.476,9.46) 41.377,9.46 ccw(c42.277,9.46) P3.1@41.64,8.824 ; P3.3@41.113,9.566 cw(c40.476,8.929) 41.377,8.929 cw(c42.277,8.929) P3.3@41.64,9.566 ; P2.3@41.113,19.39 ccw(c40.476,20.027) 41.377,20.027 ccw(c42.277,20.027) P2.3@41.64,19.39 ; P2.5@41.113,20.132 cw(c40.476,19.496) 41.377,19.496 cw(c42.277,19.496) P2.5@41.64,20.132 ; v1@41.318,5.873 ccw(c41.101,5.657) 41.101,5.963 ccw(c41.101,6.27) v1@41.318,6.053 ; P3.1@41.377,8.56 P3.3@41.377,9.83 ; P2.3@41.377,19.126 P2.5@41.377,20.396 42.154,21.173 42.154,22.159 P2.9@41.377,22.936 42.215,23.774 42.215,24.333 ; P2.5@41.377,20.769 ccw(c41.377,21.67) 42.013,21.033 ccw(c42.65,20.396) P2.5@41.75,20.396 ; P2.9@41.377,22.563 cw(c41.377,21.663) 42.013,22.299 cw(c42.65,22.936) 41.75,22.936 cw(c42.65,22.936) 42.013,23.573 cw(c41.377,24.21) P2.9@41.377,23.309 ; P3.3@41.529,9.83 P3.3@41.529,9.906 ; 42.215,24.181 42.215,24.333 ; 19.304,18.847 19.583,18.847 19.863,18.847 ; 19.863,18.847 20.086,19.07 ; R5.1@37.465,13.716 37.465,14.122
  other v1: 25.476,3.048 13.36,13.208 14.351,13.233 15.367,13.233 7.391,15.316 8.611,15.316 9.677,15.316 9.677,16.18 19.583,18.821
+3V3: C1.1 C2.1 C3.1 C5.1 C7.1 C13.2 R1.2 R10.2 R11.2 R12.2 R17.2 R19.1 R21.2 R23.1 U1.14 U2.14 U3.14 U4.14 U4.31 U6.4 | length 94.9
  Top Layer w0.203: 18.085,12.878 18.567,13.36
  Top Layer w0.254: 23.905,16.379 U4.31@25.386,16.379
  Top Layer w0.305: U6.4@3.81,1.418 6.473,1.418 ; U6.4@4.835,0.947 cw(c5.829,0.133) 5.829,1.418 cw(c5.829,2.703) U6.4@4.835,1.889 ; U6.4@5.07,0.754 cw(c6.473,-0.395) 6.473,1.418 ; U6.4@5.07,2.082 ccw(c6.473,3.231) 6.473,1.418 ; R21.2@8.023,5.022 cw(c7.633,4.632) 8.185,4.632 cw(c8.737,4.632) R21.2@8.346,5.022 ; R21.2@8.185,4.955 cw(c8.185,4.293) 8.653,4.761 ; R21.2@8.413,5.184 ccw(c8.855,5.184) R21.2@8.543,4.871 ; R23.1@10.287,10.668 12.446,10.668 12.471,10.643 ; R23.1@10.449,10.506 cw(c10.839,10.116) 10.839,10.668 cw(c10.839,11.22) R23.1@10.449,10.83 ; 12.694,10.42 cw(c10.656,8.382) C13.2@13.538,8.382 ; 13.214,9.9 cw(c11.697,8.382) C13.2@13.843,8.382 ; 13.735,9.379 cw(c12.737,8.382) C13.2@14.148,8.382 ; C13.2@13.83,7.861 cw(c12.573,6.604) 14.351,6.604 cw(c16.129,6.604) C13.2@14.872,7.861 ; C13.2@14.046,8.077 cw(c13.309,7.34) 14.351,7.34 cw(c15.393,7.34) C13.2@14.656,8.077 ; R10.2@14.09,14.217 ccw(c13.7,13.827) 13.7,14.379 ccw(c13.7,14.931) R10.2@14.09,14.541 ; R10.2@14.252,14.379 13.236,14.379 12.471,13.614 12.471,10.643 ; C13.2@14.732,9.119 ccw(c14.732,9.977) 15.339,9.37 ; C13.2@14.859,8.389 cw(c15.915,8.45) C13.2@15.167,9.198 ; C13.2@15.163,8.407 cw(c16.825,8.502) 15.648,9.679 ; C13.2@15.467,8.424 cw(c17.735,8.554) 16.129,10.16 ; C5.1@17.491,9.998 ccw(c17.101,9.608) 17.101,10.16 ccw(c17.101,10.712) C5.1@17.491,10.322 ; C5.1@17.653,10.389 ccw(c17.653,10.94) 18.043,10.55 ccw(c18.433,10.16) C5.1@17.882,10.16 ; 18.971,11.047 ccw(c18.689,11.329) U4.14@19.088,11.329 ; U4.14@19.086,12.079 19.086,11.161 18.743,10.818 18.311,10.818 C5.1@17.653,10.16 16.129,10.16 ; R12.2@20.828,8.763 R11.2@22.352,8.763 ; R12.2@20.99,8.601 cw(c21.38,8.211) 21.38,8.763 cw(c21.38,9.315) R12.2@20.99,8.925 ; R11.2@22.19,8.601 ccw(c21.8,8.211) 21.8,8.763 ccw(c21.8,9.315) R11.2@22.19,8.925 ; U1.14@24.074,2.063 25.064,2.063 C1.1@26.416,0.711 ; U1.14@24.749,2.041 cw(c24.749,1.226) 25.325,1.802 ; U1.14@24.754,2.041 cw(c24.865,1.549) 25.221,1.906 ; U4.31@25.386,16.379 26.522,16.379 26.772,16.129 ; C1.1@26.187,0.711 ccw(c25.636,0.711) 26.026,1.101 ccw(c26.416,1.492) C1.1@26.416,0.94 ; C7.1@27.139,15.971 ccw(c26.772,15.621) 26.772,16.129 ; C7.1@27.139,16.287 cw(c26.772,16.637) 26.772,16.129 ; R17.2@27.143,11.903 cw(c26.753,11.513) 27.305,11.513 cw(c27.857,11.513) R17.2@27.467,11.903 ; R17.2@27.305,12.065 27.305,10.973 27.559,10.719 R19.1@27.559,10.16 28.346,10.16 28.817,9.689 U3.14@29.733,9.689 29.733,9.017 29.86,8.89 C3.1@29.86,8.24 ; C7.1@27.356,16.18 C7.1@27.305,16.129 26.772,16.129 ; R19.1@27.397,10.322 ccw(c27.007,10.712) 27.559,10.712 ccw(c28.111,10.712) 27.721,10.322 ccw(c28.111,10.712) 28.111,10.16 ccw(c28.111,9.608) R19.1@27.721,9.998 ; 28.609,9.898 ccw(c29.058,10.347) U3.14@29.058,9.712 ; C3.1@29.698,8.402 ccw(c29.308,8.792) 29.86,8.792 ccw(c30.412,8.792) C3.1@30.022,8.402 ; U2.14@34.488,2.063 35.046,2.063 C2.1@36.449,0.66 ; U2.14@35.186,2.063 ccw(c35.522,2.063) 35.284,1.825 ; C2.1@36.22,0.66 ccw(c35.669,0.66) 36.059,1.051 ccw(c36.449,1.441) C2.1@36.449,0.889 ; 6.473,1.418 8.185,3.13 R21.2@8.185,5.184 8.23,5.184 9.68,3.734 11.836,3.734 14.351,6.248 C13.2@14.351,8.382 ; 12.471,10.643 14.351,8.763 C13.2@14.351,8.382 ; C13.2@14.351,8.382 16.129,10.16
  Bottom Layer w0.508: v1(19.583,14.046) v1(19.583,15.545) v1(21.996,17.958) v1(23.851,17.958) ; v1(21.895,5.588) v1(21.895,7.366)
+5V: C4.1 C6.2 C12.1 C14.2 L2.2 P3.7 P3.8 R8.1 R9.2 R18.2 U4.3 U4.42 U5.8 U6.3 | length 121.2
  Top Layer w0.305: C14.2@1.003,9.512 cw(c-0.254,8.255) 1.524,8.255 cw(c3.302,8.255) C14.2@2.045,9.512 ; C14.2@1.219,9.728 cw(c0.482,8.991) 1.524,8.991 cw(c2.566,8.991) C14.2@1.829,9.728 ; U6.3@1.264,8.164 ccw(c0.637,8.791) 1.524,8.791 ; U6.3@1.51,7.218 1.524,7.232 C14.2@1.524,10.414 2.413,10.414 ; 1.524,8.723 ccw(c2.315,8.723) U6.3@1.756,8.164 ; C12.1@1.785,26.965 cw(c1.394,26.575) 1.946,26.575 cw(c2.498,26.575) C12.1@2.108,26.965 ; C12.1@1.946,27.127 1.946,26.427 2.451,25.922 U5.8@4.154,25.922 ; U5.8@3.042,25.818 ccw(c2.79,25.566) 2.79,25.922 ccw(c2.79,26.278) U5.8@3.042,26.026 ; L2.2@10.922,22.83 L2.2@10.922,22.86 ; R9.2@14.935,19.812 14.935,19.605 15.619,18.921 15.619,18.481 16.22,17.879 20.368,17.879 21.586,19.097 U4.42@21.586,20.179 21.586,21.256 21.717,21.387 C6.2@21.717,21.971 v1(21.717,22.809) ; R9.2@15.164,19.812 ccw(c16.216,19.812) 15.472,19.068 ; R8.1@18.161,23.139 cw(c18.161,22.588) 18.551,22.978 cw(c18.941,23.368) R8.1@18.39,23.368 ; R8.1@18.161,23.368 18.847,22.682 v1(18.872,22.682) ; 18.655,22.874 ccw(c18.872,23.09) v1@18.872,22.784 ; C6.2@21.555,21.809 cw(c21.165,21.419) 21.717,21.419 cw(c22.269,21.419) C6.2@21.879,21.809 ; C6.2@21.555,22.133 ccw(c21.165,22.523) 21.717,22.523 ccw(c22.269,22.523) C6.2@21.879,22.133 ; v1(36.906,23.444) 37.592,22.758 37.592,16.942 39.139,15.395 40.688,15.395 41.377,14.707 P3.7@41.377,12.37 P3.8@40.183,12.37 ; P3.8@40.352,12.124 cw(c40.946,11.531) 40.946,12.37 cw(c40.946,13.209) P3.8@40.352,12.616 ; P3.7@41.131,12.124 ccw(c40.537,11.531) 40.537,12.37 ccw(c40.537,13.209) 41.131,12.616 ccw(c40.537,13.209) 41.377,13.209 ccw(c42.216,13.209) P3.7@41.622,12.616
  Top Layer w0.381: C14.2@1.524,9.97 ccw(c1.524,11.043) C14.2@2.283,10.284 ; C14.2@1.524,10.351 ccw(c1.524,12.343) 2.933,10.934 ; C14.2@1.524,10.731 ccw(c1.524,13.644) 3.584,11.585 ; C14.2@1.524,11.112 ccw(c1.524,14.945) 4.234,12.235 ; C14.2@1.524,11.493 ccw(c1.524,16.246) 4.884,12.885 ; 2.413,10.414 6.127,14.128 6.127,23.949 R18.2@5.649,24.427 U5.8@4.154,25.922 ; U5.8@4.475,25.922 ccw(c5.248,25.922) 4.701,25.375 ; U5.8@4.856,25.922 ccw(c6.549,25.922) R18.2@5.352,24.724 ; R18.2@5.459,24.427 ccw(c4.999,24.427) 5.324,24.752 ccw(c5.649,25.077) R18.2@5.649,24.618 ; R18.2@5.514,24.292 cw(c4.036,22.814) 6.127,22.814 ; R18.2@5.647,24.237 cw(c5.642,23.751) 6.127,23.751 ; R18.2@5.649,24.237 cw(c5.649,23.777) 5.974,24.102 cw(c6.3,24.427) R18.2@5.84,24.427 ; R18.2@5.651,24.617 cw(c5.646,24.137) 6.127,24.137 ; R18.2@5.784,24.562 cw(c4.956,23.733) 6.127,23.733 ; 6.279,20.472 9.169,20.472 9.946,21.249 9.946,21.854 L2.2@10.922,22.83 ; L2.2@10.576,22.484 ccw(c10.2,22.86) L2.2@10.731,22.86 ; L2.2@10.648,22.556 cw(c10.922,22.282) 10.922,22.669 cw(c10.922,22.21) 11.247,22.535 cw(c11.572,22.86) L2.2@11.112,22.86 ; L2.2@10.922,22.86 12.548,21.234 13.513,21.234 R9.2@14.935,19.812 ; 12.89,21.234 cw(c12.89,20.688) C4.1@13.276,21.074 ; 13.013,21.234 ccw(c13.013,21.608) C4.1@13.276,21.344 ; C4.1@13.411,21.019 cw(c13.411,20.252) 13.953,20.794 ; R9.2@14.745,19.812 ccw(c14.285,19.812) 14.61,20.137 ccw(c14.935,20.462) R9.2@14.935,20.002
  Bottom Layer w0.305: v1(18.872,22.682) 21.59,22.682 v1(21.717,22.809) ; 21.165,22.682 ccw(c21.165,23.361) v1@21.645,22.881 ; v1@21.717,22.874 v1(21.717,22.809) ; v1(36.906,23.444) 36.195,24.155 23.063,24.155 v1(21.717,22.809)
CASE: J1.6 L1.2 | length 5.5
  Top Layer w0.635: J1.6@7.976,13.843 L1.2@10.922,13.843 ; J1.6@8.519,13.106 cw(c10.297,11.328) 10.297,13.843 ; J1.6@8.519,14.072 ccw(c9.07,14.623) 9.07,13.843